# Altium PCB QUTMS_chargeCtrl_v1.PcbDoc
Units mm, origin at the board's own origin, x right, y up, seen from the top; angles counter-clockwise.
Board outline 162.84 x 99.75 mm, 2 copper layers (Top Layer, Bottom Layer); 12 components, 0 nets, 116 pads, 0 vias.
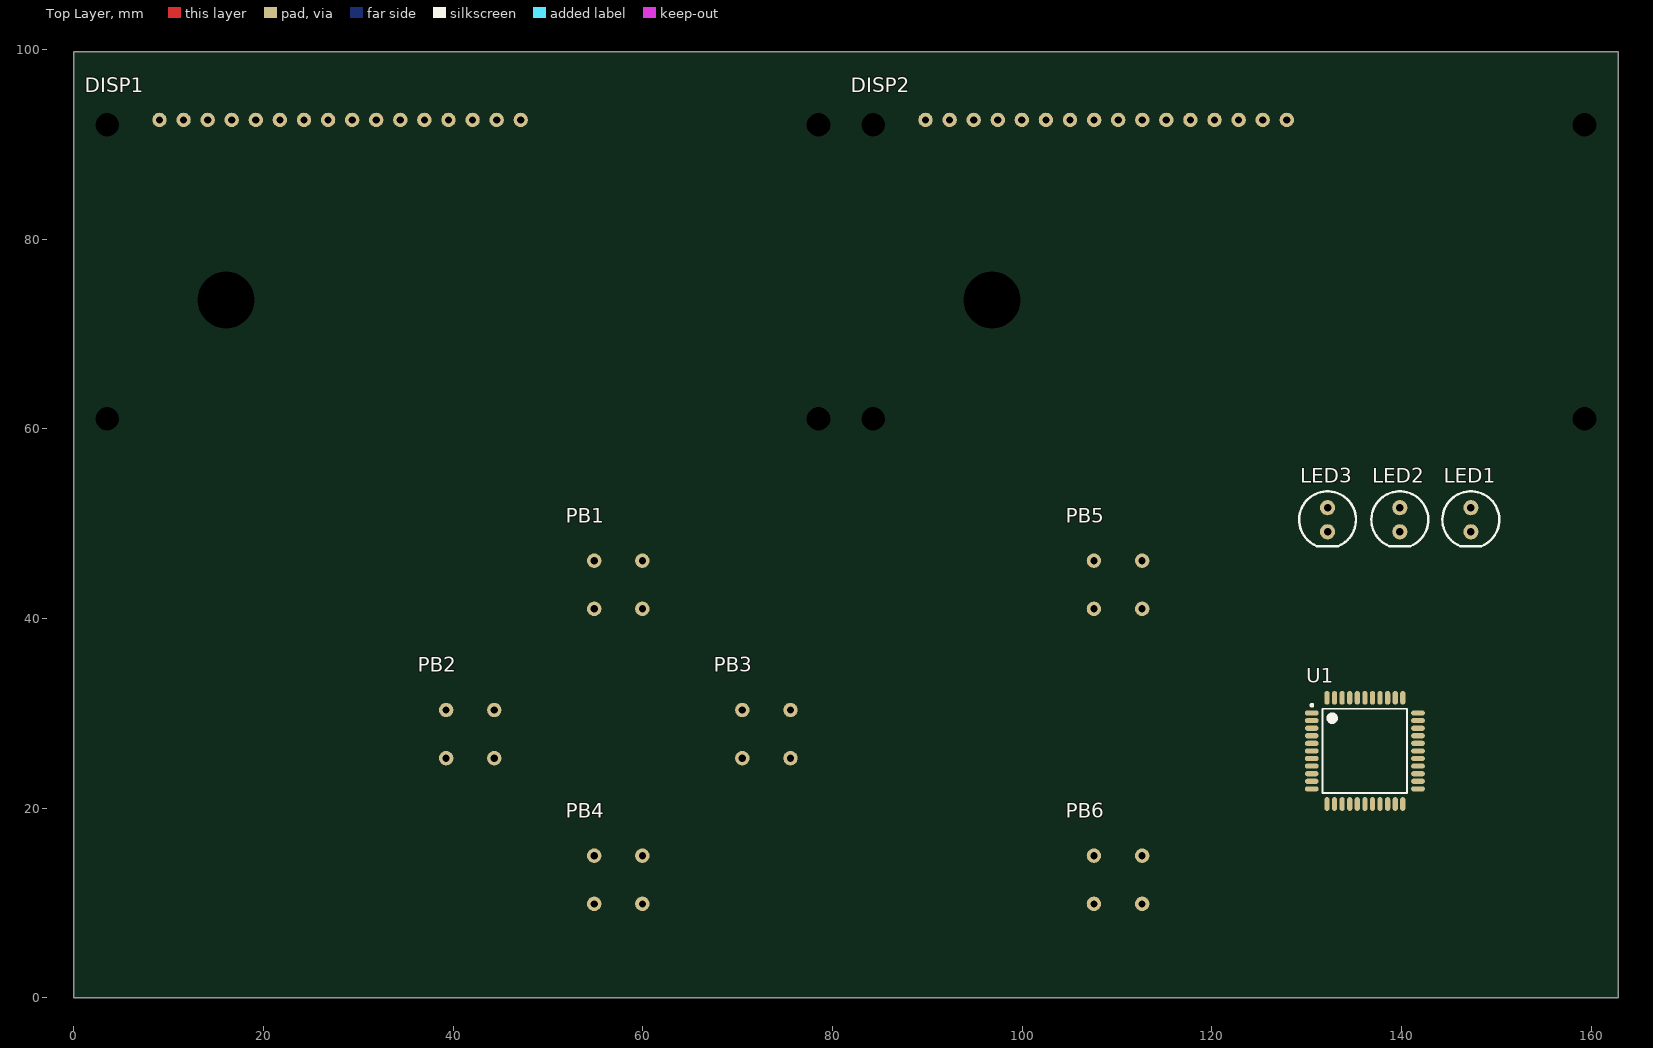
[diagram p0: Top Layer view]
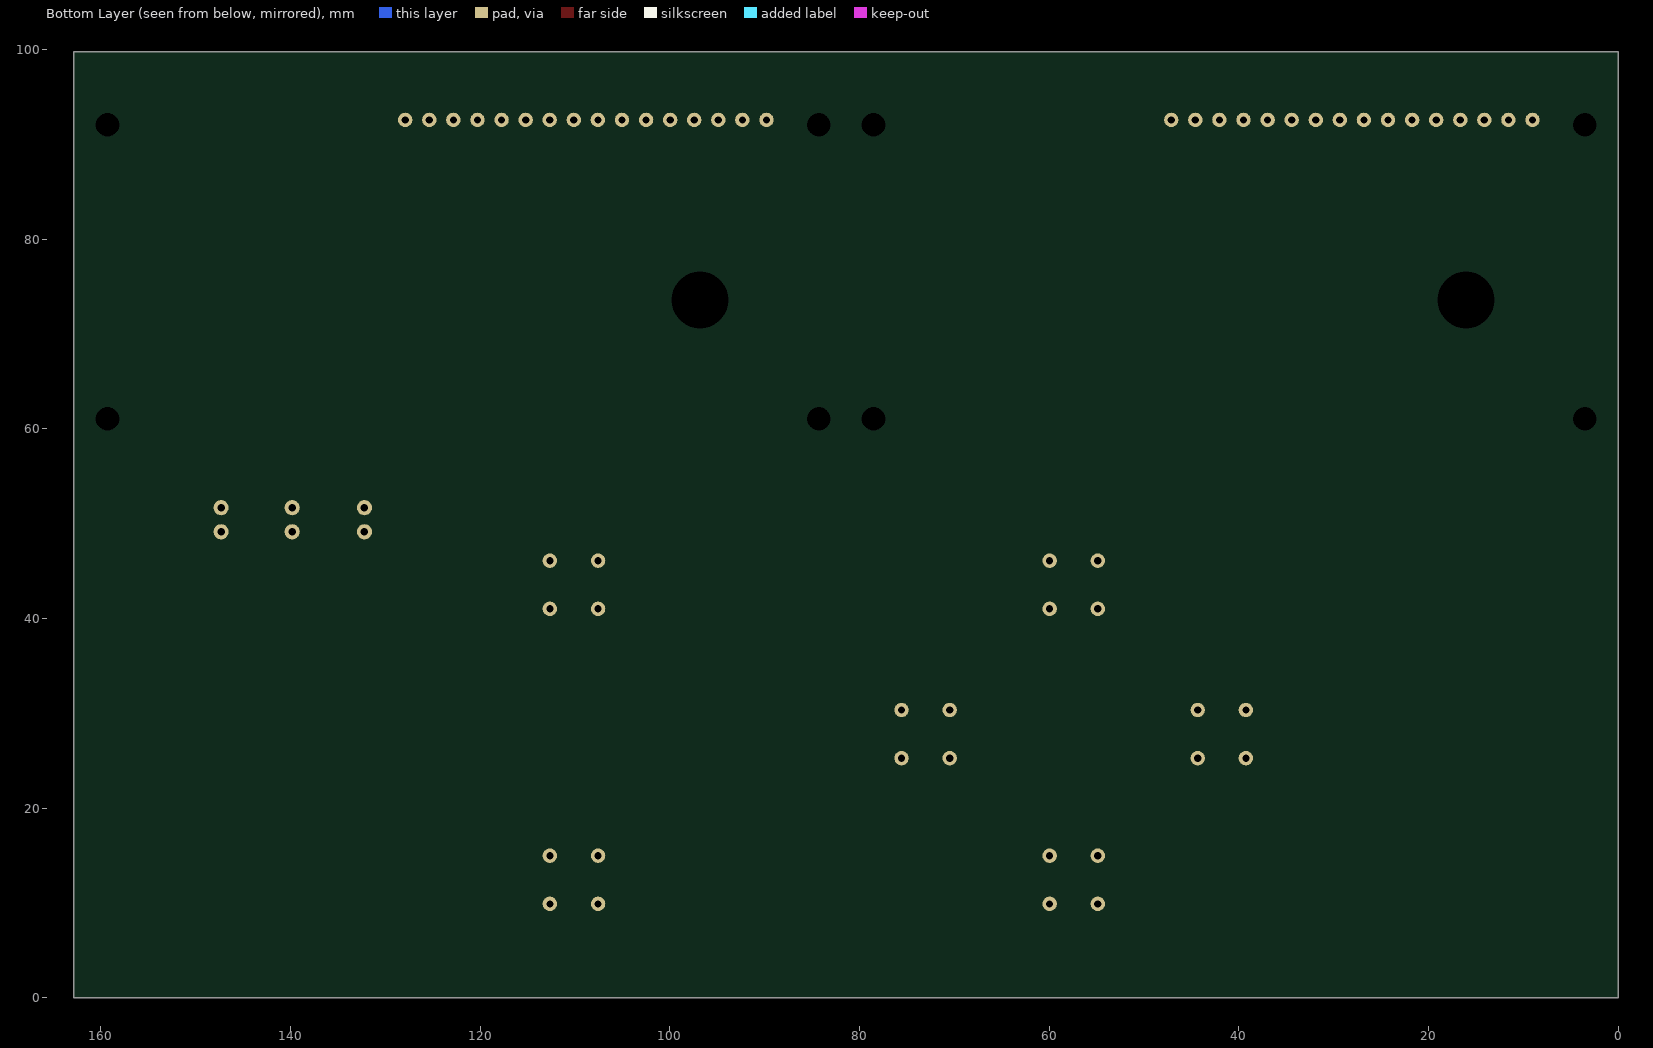
[diagram p1: Bottom Layer view, seen from below]

## Layer stack, top to bottom
Top Solder: solder mask 0.0102, Solder Resist, Dk 3.5
Top Layer: signal copper 0.0356
Dielectric 1: dielectric 0.32, FR-4, Dk 4.8
Bottom Layer: signal copper 0.0356
Bottom Solder: solder mask 0.0102, Solder Resist, Dk 3.5

## Board outline
0,0 0,99.75 162.84,99.75 162.84,0

## Design rules (kind name [scope] priority, off if disabled: settings)
Clearance [All] p1: gap=0.254
PolygonConnect [All] p1: connectstyle=Relief reliefconductorwidth=0.254 reliefentries=4 polygonreliefangle="90 Angle" airgapwidth=0.254
RoutingVias [All] p1: holewidth=0.711 width=1.27 viastyle="Through Hole" minholewidth=0.711 minwidth=1.27 maxholewidth=0.711 maxwidth=1.27
SolderMaskExpansion [All] p1: expansion=0.102
Width [All] p1: maxlimit=0.254 minlimit=0.254 preferedwidth=0.254
30 further rules are at their usual default settings.

## Classes and differential pairs
component class QUTMS_chargeCtrl_v1: DISP1 DISP2 PB1 PB2 PB3 PB4 PB5 PB6 U1

## Components (designator, comment, footprint, x,y, rotation, side; value= is the part's Value field where it differs from the comment)
DISP1 "2 x 16 OLED" 16_2_OLED 9.017,92.583 r0 top (schematic designator DISP2)
DISP2 "2 x 16 OLED" 16_2_OLED 89.806,92.583 r0 top (schematic designator DISP1)
LED1 "LED_vert1" "LEDvert1 - HIGH" 147.32,50.419 r0 top
LED2 "LED_vert1" "LEDvert1 - HIGH" 139.827,50.419 r0 top
LED3 "LED_vert1" "LEDvert1 - HIGH" 132.207,50.419 r0 top
PB1 "Push" Pushbutton_Jaycar1 54.864,46.101 r0 top
PB2 "Push" Pushbutton_Jaycar1 39.244,30.353 r0 top
PB3 "Push" Pushbutton_Jaycar1 70.484,30.353 r0 top
PB4 "Push" Pushbutton_Jaycar1 54.864,14.986 r0 top
PB5 "Push" Pushbutton_Jaycar1 107.569,46.101 r0 top
PB6 "Push" Pushbutton_Jaycar1 107.569,14.986 r0 top
U1 "xmega32a4u" 44A_L 136.144,26.035 r0 top

## Footprints (in the part's own frame and the unit in brackets; to place one, negate y for a bottom-side part, rotate by r counter-clockwise, add the part's x,y. Pads: shape width x height; smd on the part's side, far side on the other; paste and mask are expansions set on the pad)
16_2_OLED [mil]
  round 60 hole 30: 1(0,0) 2(100,0) 3(200,0) 4(300,0) 5(400,0) 6(500,0) 7(600,0) 8(700,0) 9(800,0) 10(900,0) 11(1000,0) 12(1100,0) 13(1200,0) 14(1300,0) 15(1400,0) 16(1500,0)
  body extent -315,-1339 2835,79, height 583
44A_L [mm] "Thin QFP, 44-Leads, Body 10x10mm, Pitch 0.8mm, IPC High Density"
  oval 1.45x0.55 smd: 1(-5.6,4) 2(-5.6,3.2) 3(-5.6,2.4) 4(-5.6,1.6) 5(-5.6,0.8) 6(-5.6,0) 7(-5.6,-0.8) 8(-5.6,-1.6) 9(-5.6,-2.4) 10(-5.6,-3.2) 11(-5.6,-4) 23(5.6,-4) 24(5.6,-3.2) 25(5.6,-2.4) 26(5.6,-1.6) 27(5.6,-0.8) 28(5.6,0) 29(5.6,0.8) 30(5.6,1.6) 31(5.6,2.4) 32(5.6,3.2) 33(5.6,4)
  oval 0.55x1.45 smd: 12(-4,-5.6) 13(-3.2,-5.6) 14(-2.4,-5.6) 15(-1.6,-5.6) 16(-0.8,-5.6) 17(0,-5.6) 18(0.8,-5.6) 19(1.6,-5.6) 20(2.4,-5.6) 21(3.2,-5.6) 22(4,-5.6) 34(4,5.6) 35(3.2,5.6) 36(2.4,5.6) 37(1.6,5.6) 38(0.8,5.6) 39(0,5.6) 40(-0.8,5.6) 41(-1.6,5.6) 42(-2.4,5.6) 43(-3.2,5.6) 44(-4,5.6)
  silkscreen extent -5.72,-4.45 4.45,4.95, body extent -5,-5 5,5, height 1.2
"LEDvert1 - HIGH" [mm]
  round 1.6 hole 0.8: 1(0,1.27) 2(0,-1.27)
  silkscreen extent -3,-2.79 3,3, body extent -1.82,-1.78 1.82,1.87, height 15.06
Pushbutton_Jaycar1 [mil]
  round 60 hole 30: 1(0,-200) 1(0,0) 2(200,-200) 2(200,0)
  body extent -128,-328 328,128, height 533

## Part data
DISP1 DISP2: library part OLED_2_16_AA
PB1 PB2 PB3 PB4 PB5 PB6: library part PushButton_Jaycar_PCB
U1: library part ATxmega32A4U-AU, "8/16-bit AVR XMEGA A4 Microcontroller, 1.6-3.6V, 32KB + 4KB Flash, 1KB EEPROM, 4KB SRAM, 44-pin TQFP, Industrial Grade (-40°C to 85°C), Pb-Free"

## Free pads (board coordinates)
  round 1.524 hole 2.5 unplated: ""(3.517,61.083) ""(3.517,92.083) ""(78.517,61.083) ""(78.517,92.083) ""(84.306,61.083) ""(84.306,92.083) ""(159.306,61.083) ""(159.306,92.083)
  round 1.524 hole 6 unplated: ""(16.017,73.583) ""(96.806,73.583)

## Nets (pads, with @x,y where several pads share a name; then routed paths per layer and width w, separated by ;. In a path a pad name is that pad's centre, name@x,y a point inside that pad or via, vN(x,y) a via of type N, cw(c..) or ccw(c..) an arc to the next point about the centre after c; other vN are vias at no path point)
pads on no net: DISP1.1 DISP1.2 DISP1.3 DISP1.4 DISP1.5 DISP1.6 DISP1.7 DISP1.8 DISP1.9 DISP1.10 DISP1.11 DISP1.12 DISP1.13 DISP1.14 DISP1.15 DISP1.16 DISP2.1 DISP2.2 DISP2.3 DISP2.4 DISP2.5 DISP2.6 DISP2.7 DISP2.8 DISP2.9 DISP2.10 DISP2.11 DISP2.12 DISP2.13 DISP2.14 DISP2.15 DISP2.16 LED1.1 LED1.2 LED2.1 LED2.2 LED3.1 LED3.2 PB1.1 PB1.2 PB2.1 PB2.2 PB3.1 PB3.2 PB4.1 PB4.2 PB5.1 PB5.2 PB6.1 PB6.2 U1.1 U1.2 U1.3 U1.4 U1.5 U1.6 U1.7 U1.8 U1.9 U1.10 U1.11 U1.12 U1.13 U1.14 U1.15 U1.16 U1.17 U1.18 U1.19 U1.20 U1.21 U1.22 U1.23 U1.24 U1.25 U1.26 U1.27 U1.28 U1.29 U1.30 U1.31 U1.32 U1.33 U1.34 U1.35 U1.36 U1.37 U1.38 U1.39 U1.40 U1.41 U1.42 U1.43 U1.44

## Silkscreen, mask and mechanical layers (free items; w line width, h text height)
Mechanical 1:
  the board outline again, w0.254